# Altium PCB triboard-tc3x7-extension-V01.PcbDoc (part 2 of 2)
Units mm, origin at the board's own origin, x right, y up, seen from the top; angles counter-clockwise.
Board outline 170 x 190 mm, 4 copper layers (Top Layer, Mid Layer 1, Mid Layer 2, Bottom Layer), stack 1.586 mm thick; 25 components, 194 nets, 552 pads, 468 vias.
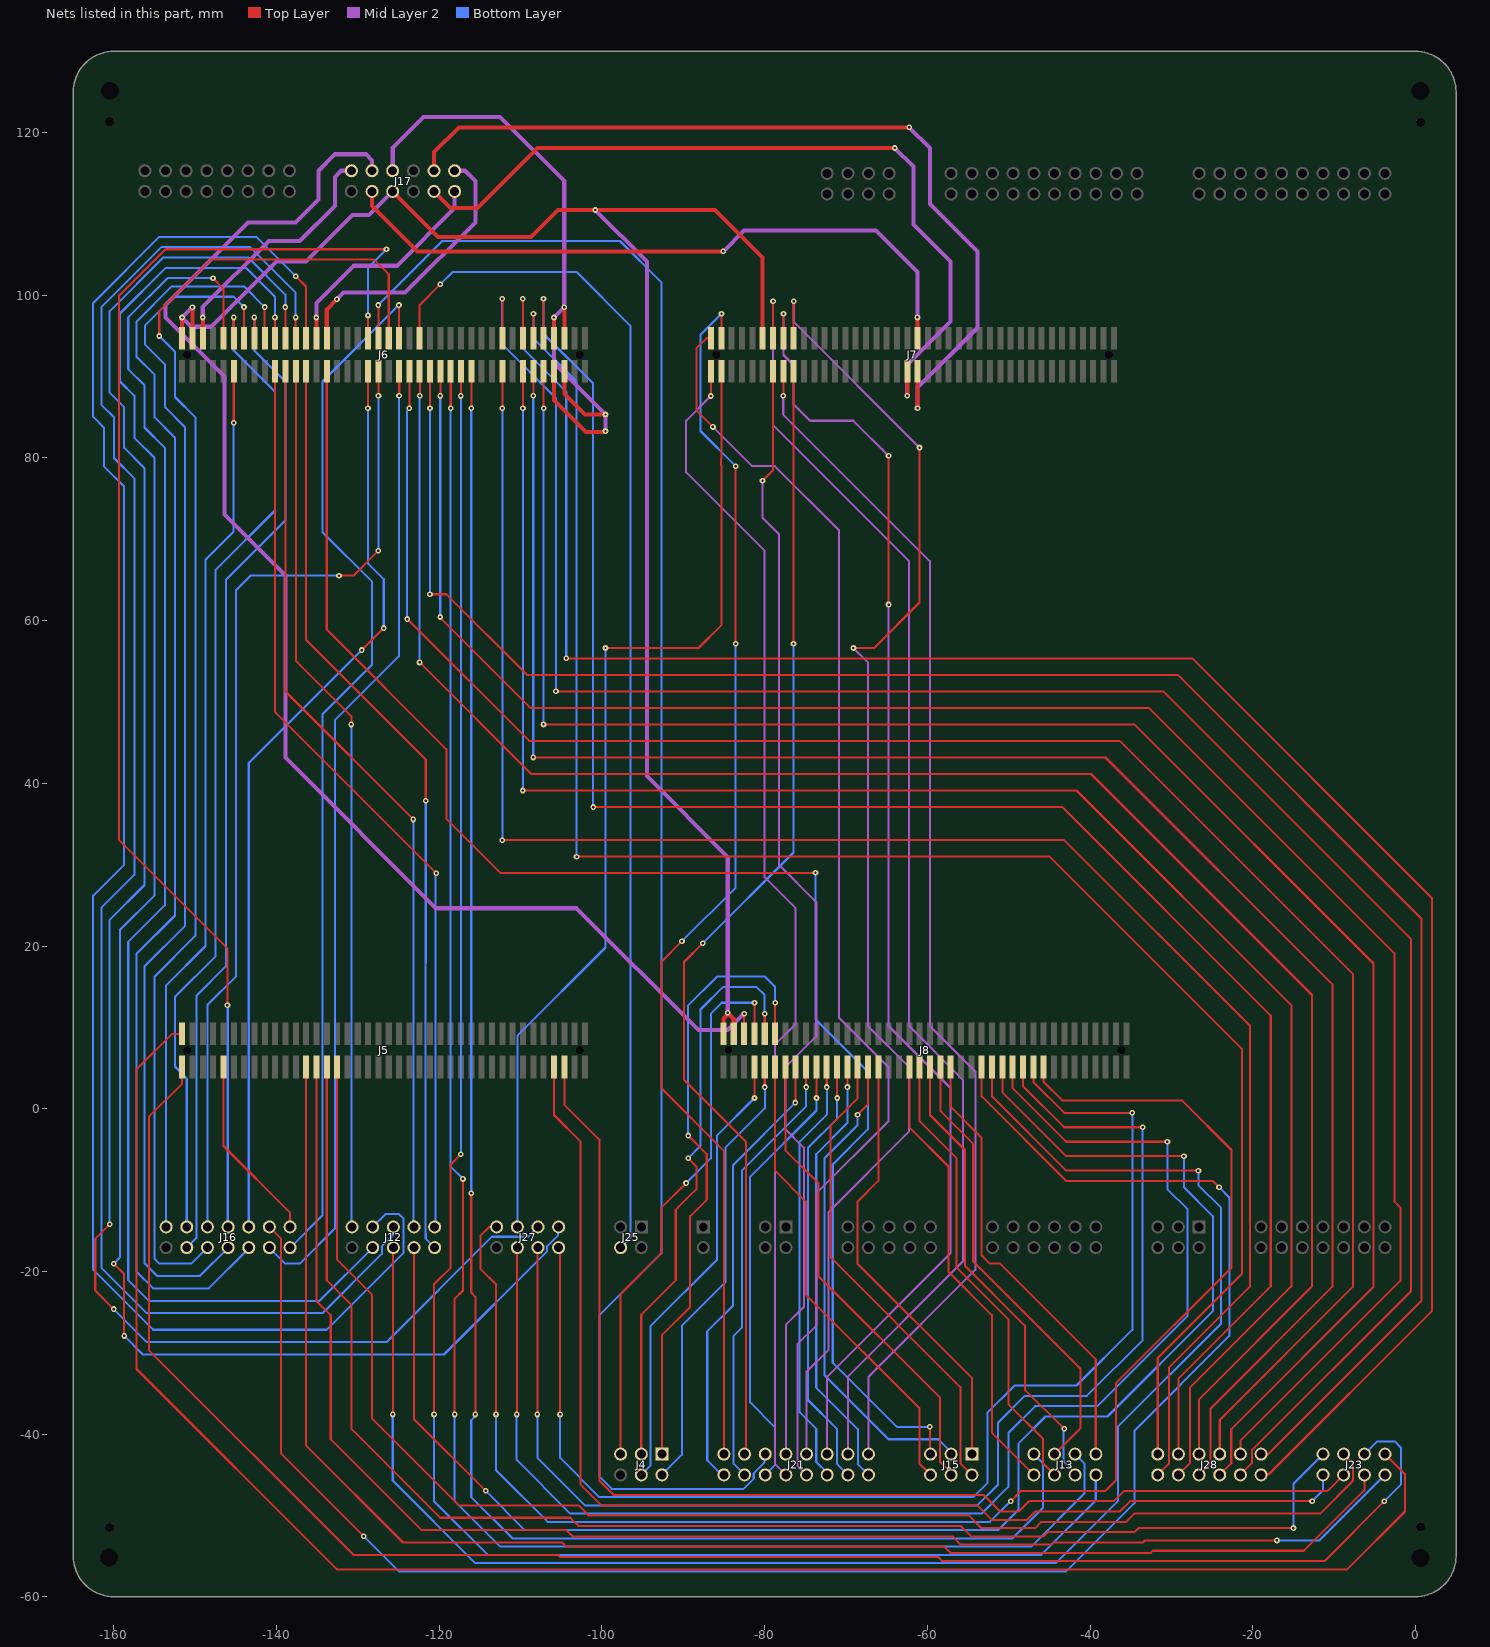
[diagram p4: the nets of this part, all layers, seen from the top]

## Via types
v1: diameter 0.7, hole 0.3, Top Layer to Bottom Layer, tented both sides, 468 vias

## Nets (pads, with @x,y where several pads share a name; then routed paths per layer and width w, separated by ;. In a path a pad name is that pad's centre, name@x,y a point inside that pad or via, vN(x,y) a via of type N, cw(c..) or ccw(c..) an arc to the next point about the centre after c; other vN are vias at no path point) (continued)
P13.3: J6.33 J25.4 | length 148.2
  Top Layer w0.254: J6.33@-122.408,94.723 -122.418,94.733 -122.418,98.816 v1(-119.888,101.346)
  Bottom Layer w0.254: v1(-119.888,101.346) -118.364,102.87 -103.124,102.87 -96.52,96.266 -96.52,-15.889 J25.4@-97.71,-17.079
P14.0: J6.61 J27.1 | length 219.8
  Top Layer w0.254: v1(-160.02,-19.05) -158.75,-20.32 v1(-158.75,-27.94) ; v1(-140.208,97.282) -140.198,97.272 J6.61@-140.198,94.733
  Bottom Layer w0.254: v1(-160.02,-19.05) -159.258,-18.288 -159.258,21.992 -155,26.25 -155,80 -157.5,82.5 -157.5,87.65 -159.258,89.408 -159.258,97.767 -153.647,103.378 -143.764,103.378 -140.208,99.822 v1(-140.208,97.282) ; v1(-158.75,-27.94) -156.464,-30.226 -119.423,-30.226 -106.743,-17.546 -106.743,-16.898 -105.4,-15.555 -105.4,-14.608 J27.1@-105.33,-14.539
P14.1: J6.59 J27.3 | length 219.2
  Top Layer w0.254: v1(-160.528,-14.224) -162.306,-16.002 -162.306,-22.352 v1(-160.02,-24.638) ; v1(-138.938,98.552) -138.928,98.542 J6.59@-138.928,94.733
  Bottom Layer w0.254: v1(-160.528,-14.224) -160.528,23.222 -156.25,27.5 -156.25,78.75 -158.75,81.25 -158.75,86.25 -160.528,88.028 -160.528,98.044 -153.924,104.648 -143.51,104.648 -138.938,100.076 v1(-138.938,98.552) ; v1(-160.02,-24.638) -155.956,-28.702 -126.492,-28.702 -113.538,-15.748 -109.079,-15.748 J27.3@-107.87,-14.539
P14.3: J7.78 J27.5 | length 122.3
  Top Layer w0.254: v1(-99.568,56.642) -88.138,56.642 -85.324,59.456 -85.324,79.061 -85.344,79.081 -85.344,79.923 -85.324,79.943 J7.78@-85.324,90.653
  Bottom Layer w0.254: J27.5@-110.41,-14.539 -110.41,8.97 -99.568,19.812 v1(-99.568,56.642)
P14.7: J8.18 J27.7 | length 187.9
  Top Layer w0.254: v1(-113.03,-37.592) -113.03,-21.59 -114.955,-19.665 -114.955,-15.641 -113.865,-14.551 -112.963,-14.551 J27.7@-112.95,-14.539 ; v1(-49.75,-48.25) -48.49,-46.99 -38.1,-46.99 -36.83,-45.72 -36.83,-33.782 -22.606,-19.558 -22.606,-5.08 -28.702,1.016 -43.434,1.016 -45.7,3.282 J8.18@-45.7,5.131
  Bottom Layer w0.254: v1(-113.03,-37.592) -113.03,-44.45 -106.68,-50.8 -52.324,-50.8 -49.774,-48.25 v1(-49.75,-48.25)
P14.8: J8.20 J27.2 | length 154.1
  Top Layer w0.254: J27.2@-105.33,-17.079 -105.156,-17.253 v1(-105.156,-37.592) ; J8.20@-46.97,5.131 -46.97,3.282 -43.18,-0.508 v1(-34.798,-0.508)
  Bottom Layer w0.254: v1(-105.156,-37.592) -105.156,-42.926 -100.33,-47.752 -54.356,-47.752 -52.578,-45.974 -52.578,-37.338 -49.276,-34.036 -41.656,-34.036 -34.798,-27.178 v1(-34.798,-0.508)
P14.9: J8.22 J27.4 | length 160.9
  Top Layer w0.254: v1(-107.95,-37.592) -107.91,-37.552 -107.91,-17.119 J27.4@-107.87,-17.079 ; J8.22@-48.24,5.131 -48.24,2.774 -43.18,-2.286 v1(-33.528,-2.286)
  Bottom Layer w0.254: v1(-107.95,-37.592) -107.95,-42.926 -102.108,-48.768 -53.848,-48.768 -51.308,-46.228 -51.308,-38.608 -48.006,-35.306 -40.386,-35.306 -33.528,-28.448 v1(-33.528,-2.286)
P14.10: J8.24 J27.6 | length 172.1
  Top Layer w0.254: v1(-110.49,-37.592) -110.45,-37.552 -110.45,-17.119 J27.6@-110.41,-17.079 ; J8.24@-49.51,5.131 -49.51,2.52 -42.926,-4.064 v1(-30.48,-4.064)
  Bottom Layer w0.254: v1(-110.49,-37.592) -110.49,-43.18 -103.886,-49.784 -53.34,-49.784 -50.038,-46.482 -50.038,-39.878 -46.736,-36.576 -39.116,-36.576 -28.003,-25.463 -28.003,-12.383 -30.48,-9.906 v1(-30.48,-4.064)
P15.0: J6.62 J12.1 | length 113.5
  Top Layer w0.254: J6.62@-140.188,90.653 -140.188,48.748 v1(-120.396,28.956)
  Bottom Layer w0.254: J12.1@-120.57,-14.539 -120.483,-14.452 -120.483,28.869 v1(-120.396,28.956)
P15.1: J6.60 J12.3 | length 111.7
  Top Layer w0.254: J6.60@-138.918,90.653 -138.918,51.288 v1(-123.19,35.56)
  Bottom Layer w0.254: v1(-123.19,35.56) -123.15,35.52 -123.15,-14.499 J12.3@-123.11,-14.539
P15.2: J6.57 J12.5 | length 200
  Top Layer w0.254: v1(-137.668,97.282) -137.658,97.272 -137.658,94.733 J6.57@-137.648,94.723
  Bottom Layer w0.254: v1(-137.668,97.282) -137.658,97.292 -137.658,100.32 -143.256,105.918 -154.178,105.918 -161.544,98.552 -161.544,86.544 -160,85 -160,80 -157.5,77.5 -157.5,28.75 -161.544,24.706 -161.544,-19.558 -155.956,-25.146 -134.366,-25.146 -127.063,-17.843 -127.063,-16.898 -125.72,-15.555 -125.72,-14.608 J12.5@-125.65,-14.539
P15.3: J6.55 J12.7 | length 214.4
  Top Layer w0.254: v1(-137.668,102.362) -136.388,101.082 J6.55@-136.388,94.733
  Bottom Layer w0.254: v1(-137.668,102.362) -142.494,107.188 -154.432,107.188 -162.56,99.06 -162.56,85.06 -161.25,83.75 -161.25,79 -158.75,76.5 -158.75,30 -162.56,26.19 -162.56,-19.812 -155.194,-27.178 -133.858,-27.178 -124.393,-17.713 -124.393,-13.529 -124.968,-12.954 -126.605,-12.954 J12.7@-128.177,-14.526
P15.4: J6.58 J12.9 | length 108.1
  Top Layer w0.254: J6.58@-137.638,90.663 -137.638,55.088 -130.81,48.26 v1(-130.81,47.244)
  Bottom Layer w0.254: v1(-130.81,47.244) -130.81,-14.459 J12.9@-130.73,-14.539
P15.5: J6.56 J12.2 | length 114.3
  Top Layer w0.254: J6.56@-136.368,90.663 -136.368,57.628 -121.666,42.926 v1(-121.666,37.846)
  Bottom Layer w0.254: v1(-121.666,37.846) -121.666,17.9 -121.697,17.869 -121.697,-14.539 -121.697,-14.563 -121.666,-15.983 -121.616,-16.033 J12.2@-120.57,-17.079
P15.6: J8.26 J12.4 | length 190.1
  Top Layer w0.254: J12.4@-123.11,-17.079 -123.11,-38.18 v1(-114.3,-46.99) ; J8.26@-50.78,5.131 -50.78,2.012 -42.926,-5.842 v1(-28.448,-5.842)
  Bottom Layer w0.254: v1(-114.3,-46.99) -109.474,-51.816 -51.308,-51.816 -48.768,-49.276 -48.768,-41.148 -45.466,-37.846 -37.846,-37.846 -24.892,-24.892 -24.892,-13.208 -28.448,-9.652 v1(-28.448,-5.842)
P15.7: J8.28 J12.6 | length 205
  Top Layer w0.254: v1(-125.73,-37.592) -125.69,-37.552 -125.69,-17.119 J12.6@-125.65,-17.079 ; J8.28@-52.05,5.131 -52.05,1.504 -42.926,-7.62 v1(-26.67,-7.62)
  Bottom Layer w0.254: v1(-125.73,-37.592) -125.73,-45.72 -115.57,-55.88 -44.196,-55.88 -36.576,-48.26 -36.576,-39.116 -23.876,-26.416 -23.876,-12.192 -26.67,-9.398 v1(-26.67,-7.62)
P15.8: J6.71 J12.8 | length 176.2
  Top Layer w0.254: v1(-147.828,102.108) -146.548,100.828 -146.548,94.733 J6.71@-146.538,94.723
  Bottom Layer w0.254: v1(-147.828,102.108) -153.416,102.108 -158.242,97.282 -158.242,90.932 -156.25,88.94 -156.25,83.75 -153.75,81.25 -153.75,25 -158.242,20.508 -158.242,-21.082 -155.702,-23.622 -134.733,-23.622 J12.8@-128.19,-17.079
P20.0: J5.72 J16.1 | length 23.1
  Top Layer w0.254: J5.72@-146.538,5.131 -146.538,-4.592 -138.35,-12.78 J16.1@-138.35,-14.539
P20.1: J8.30 J16.3 | length 224.5
  Top Layer w0.254: J16.3@-140.89,-14.539 -139.477,-15.952 -139.477,-42.387 v1(-129.286,-52.578) ; J8.30@-53.32,5.131 -53.32,1.504 -42.926,-8.89 -24.892,-8.89 v1(-24.13,-9.652)
  Bottom Layer w0.254: v1(-129.286,-52.578) -124.968,-56.896 -42.926,-56.896 -34.544,-48.514 -34.544,-39.624 -22.86,-27.94 -22.86,-10.922 v1(-24.13,-9.652)
P20.2: J6.44 J16.5 | length 113
  Top Layer w0.254: v1(-129.54,56.388) v1@-126.746,59.182 ; v1(-128.778,86.106) -128.768,86.116 -128.768,90.643 J6.44@-128.758,90.653
  Bottom Layer w0.254: J16.5@-143.43,-14.539 -143.43,42.498 v1(-129.54,56.388) ; v1(-128.778,86.106) -128.778,70.358 -128.778,67.056 -126.835,65.113 v1(-126.835,59.093)
P20.3: J6.43 J16.7 | length 167.2
  Top Layer w0.254: v1(-146.05,12.7) -146.05,19.711 -159.359,33.02 -159.359,99.975 -153.67,105.664 v1(-126.492,105.664) ; J6.43@-128.758,94.723 v1@-128.758,97.516
  Bottom Layer w0.254: v1(-146.05,12.7) -146.01,12.66 -146.01,-14.499 J16.7@-145.97,-14.539 ; v1(-128.768,97.526) -128.768,103.388 v1(-126.492,105.664)
P20.6: J6.42 J16.9 | length 121.3
  Top Layer w0.254: v1(-132.334,65.532) -130.556,65.532 v1(-127.508,68.58) ; v1(-127.488,87.65) -127.478,87.66 J6.42@-127.478,90.663
  Bottom Layer w0.254: J16.9@-148.51,-14.539 -148.51,12.74 -144.984,16.266 -144.984,63.766 -143.218,65.532 v1(-132.334,65.532) ; v1(-127.508,68.58) -127.498,68.59 -127.498,87.64 v1(-127.488,87.65)
P20.7: J6.69 J16.11 | length 122.2
  Top Layer w0.254: v1(-145.288,97.282) -145.278,97.272 -145.278,94.733 J6.69@-145.268,94.723
  Bottom Layer w0.254: J16.11@-151.05,-14.539 -151.05,3.73 -152.5,5.18 -152.5,13.75 -147.5,18.75 -147.5,66.25 -140.208,73.542 -140.208,88.138 -145.288,93.218 v1(-145.288,97.282)
P20.8: J6.70 J16.13 | length 108.7
  Top Layer w0.254: v1(-145.288,84.328) -145.278,84.338 -145.278,90.643 J6.70@-145.258,90.663
  Bottom Layer w0.254: J16.13@-153.59,-14.539 -153.59,15.16 -148.75,20 -148.75,67.5 -145.288,70.962 v1(-145.288,84.328)
P20.9: J6.37 J16.2 | length 130.5
  Top Layer w0.254: J6.37@-124.958,94.733 v1@-124.958,98.796
  Bottom Layer w0.254: J16.2@-138.35,-17.079 -134.366,-13.095 -134.366,48.514 -128.27,54.61 -128.27,64.77 -134.366,70.866 -134.366,89.408 v1(-124.968,98.806)
P20.10: J6.38 J16.4 | length 119.3
  Top Layer w0.254: v1(-124.948,87.65) -124.928,87.67 J6.38@-124.928,90.673
  Bottom Layer w0.254: J16.4@-140.89,-17.079 -138.919,-19.05 -137.16,-19.05 -132.842,-14.732 -132.842,47.752 -124.968,55.626 -124.968,71.404 -124.948,71.424 v1(-124.948,87.65)
P20.11: J6.63 J16.6 | length 160
  Top Layer w0.254: v1(-141.478,98.552) -141.468,98.542 -141.468,94.733 J6.63@-141.458,94.723
  Bottom Layer w0.254: J16.6@-143.43,-17.079 -143.43,-17.192 -148.336,-22.098 -155.194,-22.098 -157.226,-20.066 -157.226,19.024 -152.5,23.75 -152.5,82.5 -155,85 -155,90.23 -157.226,92.456 -157.226,96.774 -152.908,101.092 -144.018,101.092 v1(-141.478,98.552)
P20.12: J6.67 J16.8 | length 149.8
  Top Layer w0.254: v1(-144.018,98.552) -144.008,98.542 -144.008,94.733 J6.67@-143.998,94.723
  Bottom Layer w0.254: J16.8@-145.97,-17.079 -149.465,-20.574 -154.686,-20.574 -156.25,-19.01 -156.25,17.5 -151.25,22.5 -151.25,83.75 -153.714,86.214 -153.714,91.484 -156.21,93.98 -156.21,96.266 -152.654,99.822 -145.288,99.822 v1(-144.018,98.552)
P20.13: J6.39 J16.10 | length 167.4
  Top Layer w0.254: v1(-154.432,94.996) -154.432,98.044 -148.082,104.394 -128.016,104.394 -126.218,102.596 J6.39@-126.218,94.723
  Bottom Layer w0.254: v1(-154.432,94.996) -152.5,93.064 -152.5,87.5 -150,85 -150,21.25 -155,16.25 -155,-18.482 -154.432,-19.05 -150.481,-19.05 J16.10@-148.51,-17.079
P20.14: J6.65 J16.12 | length 123.5
  Top Layer w0.254: v1(-142.748,97.282) -142.738,97.272 -142.738,94.733 J6.65@-142.728,94.723
  Bottom Layer w0.254: J16.12@-151.05,-17.079 -149.86,-15.889 -149.86,13.89 -146.25,17.5 -146.25,65 -138.938,72.312 -138.938,89.408 -142.748,93.218 v1(-142.748,97.282)
P21.0: J5.79 J23.1 | length 221.4
  Top Layer w0.254: J5.79@-151.618,9.201 -152.851,9.201 -157.226,4.826 -157.226,-32.004 -132.588,-56.642 -8.382,-56.642 -1.27,-49.53 -1.27,-44.939 J23.1@-3.73,-42.479
P21.1: J5.80 J23.3 | length 215.1
  Top Layer w0.254: J5.80@-151.618,5.131 -151.618,3.068 -155.702,-1.016 -155.702,-29.718 -130.556,-54.864 -105.41,-54.864 -105.156,-55.118 -58.674,-55.118 -58.166,-55.626 -11.176,-55.626 v1(-3.81,-48.26)
  Bottom Layer w0.254: J23.3@-6.257,-42.466 -4.685,-40.894 -2.54,-40.894 -1.778,-41.656 -1.778,-46.228 v1(-3.81,-48.26)
P21.2: J5.50 J23.5 | length 177.3
  Top Layer w0.254: J5.50@-132.568,5.131 -132.568,-18.562 -128.27,-22.86 -128.27,-38.1 -117.602,-48.768 -102.87,-48.768 -101.6,-50.038 -54.864,-50.038 -53.34,-51.562 -46.736,-51.562 -45.974,-50.8 -35.56,-50.8 -34.544,-49.784 -11.684,-49.784 -7.683,-45.783 -7.683,-43.606 J23.5@-8.81,-42.479
P21.3: J5.52 J23.7 | length 178.1
  Top Layer w0.254: J5.52@-133.838,5.131 -133.838,-21.102 -130.81,-24.13 -130.81,-39.37 -119.888,-50.292 -103.886,-50.292 -102.87,-51.308 -55.88,-51.308 -54.61,-52.578 -45.72,-52.578 -45.212,-52.07 -34.544,-52.07 -34.036,-51.562 v1(-14.986,-51.562)
  Bottom Layer w0.254: v1(-14.986,-51.562) -14.986,-46.115 J23.7@-11.35,-42.479
P21.4: J5.54 J23.2 | length 185.1
  Top Layer w0.254: J5.54@-135.108,5.131 -135.108,-23.642 -133.35,-25.4 -133.35,-40.64 -122.174,-51.816 -104.394,-51.816 -103.632,-52.578 -56.896,-52.578 -55.88,-53.594 -44.704,-53.594 -44.45,-53.34 -33.528,-53.34 -33.274,-53.086 v1@-17.029,-53.086 ; J23.2@-3.77,-45.059 J23.2@-3.73,-45.019
  Bottom Layer w0.254: v1(-17.018,-53.086) -11.797,-53.086 J23.2@-3.73,-45.019
P21.5: J5.56 J23.4 | length 187.2
  Top Layer w0.254: J5.56@-136.378,5.131 -136.378,-41.422 -124.46,-53.34 -104.902,-53.34 -104.394,-53.848 -57.912,-53.848 -57.15,-54.61 -32.512,-54.61 -32.258,-54.356 -13.716,-54.356 -6.27,-46.91 J23.4@-6.27,-45.019
P21.6: J5.06 J23.6 | length 147.6
  Top Layer w0.254: J5.06@-104.628,5.131 -104.628,0.488 -100.33,-3.81 -100.33,-45.72 -98.552,-47.498 -53.086,-47.498 -51.054,-49.53 -48.768,-49.53 -47.498,-48.26 -37.084,-48.26 -35.814,-46.99 -10.781,-46.99 J23.6@-8.81,-45.019
P21.7: J5.08 J23.8 | length 149.2
  Top Layer w0.254: J5.08@-105.898,5.131 -105.898,-0.782 -102.616,-4.064 -102.616,-46.228 -100.076,-48.768 -53.848,-48.768 -52.07,-50.546 -47.752,-50.546 -46.736,-49.53 -36.322,-49.53 -35.052,-48.26 v1(-12.7,-48.26) ; J23.8@-11.39,-45.059 J23.8@-11.35,-45.019
  Bottom Layer w0.254: v1(-12.7,-48.26) -11.35,-46.91 J23.8@-11.35,-45.019
P22.0: J6.32 J28.1 | length 240.4
  Top Layer w0.254: v1(-121.158,63.246) -119.126,63.246 -109.22,53.34 -29.21,53.34 0.762,23.368 0.762,-23.622 -18.055,-42.439 -18.93,-42.439 J28.1@-18.97,-42.479 ; v1@-121.138,86.126 J6.32@-121.138,90.653
  Bottom Layer w0.254: v1(-121.158,63.246) -121.153,63.251 -121.153,86.111 v1(-121.148,86.116)
P22.1: J6.30 J28.3 | length 234.7
  Top Layer w0.254: v1(-119.888,60.452) -119.888,60.365 -108.799,49.276 -32.766,49.276 -2.54,19.05 -2.54,-11.46 -1.849,-12.151 -1.849,-21.153 -21.51,-40.814 J28.3@-21.51,-42.479 ; v1@-119.868,87.65 J6.30@-119.868,90.653
  Bottom Layer w0.254: v1(-119.888,60.452) v1(-119.888,87.63)
P22.2: J6.36 J28.5 | length 230.7
  Top Layer w0.254: v1(-123.952,60.198) -108.966,45.212 -36.322,45.212 -7.683,16.573 -7.683,-21.907 -24.05,-38.274 J28.5@-24.05,-42.479 ; v1@-123.678,86.126 J6.36@-123.678,90.653
  Bottom Layer w0.254: v1(-123.952,60.198) -123.952,85.793 -123.688,86.057 v1(-123.688,86.116)
P22.3: J6.34 J28.7 | length 224.7
  Top Layer w0.254: v1(-122.428,54.864) -108.712,41.148 -39.878,41.148 -12.7,13.97 -12.7,-21.844 -26.59,-35.734 J28.7@-26.59,-42.479 ; v1@-122.388,87.67 J6.34@-122.388,90.673
  Bottom Layer w0.254: v1(-122.428,54.864) -122.418,54.874 -122.418,87.64 v1(-122.408,87.65)
P22.4: J6.09 J28.9 | length 222.4
  Top Layer w0.254: v1(-107.188,99.568) -107.178,99.558 -107.178,94.733 J6.09@-107.168,94.723 ; v1(-101.092,37.084) -43.434,37.084 -17.78,11.43 -17.78,-21.844 -29.13,-33.194 J28.9@-29.13,-42.479
  Bottom Layer w0.254: v1(-107.188,99.568) -107.188,95.25 -101.092,89.154 v1(-101.092,37.084)
P22.5: J6.11 J28.11 | length 217.7
  Top Layer w0.254: J6.11@-108.438,94.723 v1@-108.438,97.726 ; v1(-103.124,30.988) -44.958,30.988 -21.336,7.366 -21.336,-20.32 -31.67,-30.654 J28.11@-31.67,-42.479
  Bottom Layer w0.254: v1(-108.428,97.736) -108.428,94.712 -103.124,89.408 -103.124,31.75 -103.136,31.738 -103.136,31 v1(-103.124,30.988)
P22.6: J6.13 J28.2 | length 250
  Top Layer w0.254: v1(-109.728,99.568) -109.718,99.558 -109.718,94.733 J6.13@-109.708,94.723 ; v1(-104.394,55.372) -27.432,55.372 2.032,25.908 2.032,-24.892 -18.055,-44.979 -18.93,-44.979 J28.2@-18.97,-45.019
  Bottom Layer w0.254: v1(-109.728,99.568) -109.728,93.472 -104.394,88.138 v1(-104.394,55.372)
P22.7: J6.17 J28.4 | length 248.2
  Top Layer w0.254: v1(-112.268,99.568) -112.258,99.558 -112.258,94.733 J6.17@-112.248,94.723 ; v1(-105.664,51.308) -30.988,51.308 -0.508,20.828 -0.508,-22.423 -20.097,-42.012 -20.097,-43.606 J28.4@-21.51,-45.019
  Bottom Layer w0.254: v1(-112.268,99.568) -112.268,93.98 -105.664,87.376 v1(-105.664,51.308)
P22.8: J6.10 J28.6 | length 228.3
  Top Layer w0.254: v1(-107.188,47.244) -34.544,47.244 -5.143,17.843 -5.143,-21.907 -22.637,-39.401 -22.637,-43.606 J28.6@-24.05,-45.019 ; v1@-107.168,86.126 J6.10@-107.168,90.653
  Bottom Layer w0.254: v1(-107.188,47.244) -107.183,47.249 -107.183,86.111 v1(-107.178,86.116)
P22.9: J6.12 J28.8 | length 224.4
  Top Layer w0.254: v1(-108.458,43.18) -38.1,43.18 -10.16,15.24 -10.16,-21.844 -25.177,-36.861 -25.177,-43.606 J28.8@-26.59,-45.019 ; v1@-108.438,87.65 J6.12@-108.438,90.653
  Bottom Layer w0.254: v1(-108.458,43.18) -108.453,43.185 -108.453,87.635 v1(-108.448,87.64)
P22.10: J6.14 J28.10 | length 220.4
  Top Layer w0.254: v1(-109.728,39.116) -41.656,39.116 -15.24,12.7 -15.24,-21.844 -27.717,-34.321 -27.717,-43.606 J28.10@-29.13,-45.019 ; v1@-109.708,86.126 J6.14@-109.708,90.653
  Bottom Layer w0.254: v1(-109.728,39.116) -109.723,39.121 -109.723,86.111 v1(-109.718,86.116)
P22.11: J6.18 J28.12 | length 218.9
  Top Layer w0.254: v1(-112.25,33) -112.23,33.02 -43.18,33.02 -20.32,10.16 -20.32,-21.844 -30.311,-31.835 -30.311,-43.66 J28.12@-31.67,-45.019 ; v1@-112.248,86.126 J6.18@-112.248,90.653
  Bottom Layer w0.254: v1(-112.258,86.116) -112.254,86.112 -112.254,33.004 v1(-112.25,33)
P23.0: J8.36 J13.1 | length 55.7
  Top Layer w0.254: J8.36@-57.13,5.131 -57.13,0.234 -53.34,-3.556 -53.34,-18.034 -52.324,-19.05 -51.054,-19.05 -39.29,-30.814 J13.1@-39.29,-42.479
P23.1: J6.28 J13.3 | length 227.7
  Top Layer w0.254: v1@-118.598,86.126 J6.28@-118.598,90.653 ; v1(-118.11,-37.592) -118.11,-23.368 -117.094,-22.352 v1(-117.094,-8.636)
  Bottom Layer w0.254: v1(-118.608,86.116) -118.608,-7.122 v1(-117.094,-8.636) ; v1(-118.11,-37.592) -118.11,-48.26 -112.522,-53.848 -47.244,-53.848 -40.703,-47.307 -40.703,-43.606 J13.3@-41.83,-42.479
P23.2: J8.38 J13.5 | length 56.1
  Top Layer w0.254: J8.38@-58.4,5.131 -58.4,-0.274 -54.356,-4.318 -54.356,-18.796 -41.148,-32.004 -41.148,-39.257 J13.5@-44.37,-42.479
P23.3: J6.24 J13.7 | length 219.8
  Top Layer w0.254: v1(-116.078,-10.414) -116.078,-22.606 -115.57,-23.114 v1(-115.57,-37.592) ; v1@-116.058,86.126 J6.24@-116.058,90.653
  Bottom Layer w0.254: v1(-116.078,-10.414) -116.078,86.106 v1(-116.068,86.116) ; v1(-115.57,-37.592) -115.57,-37.779 -116.078,-38.287 -116.078,-47.752 -110.998,-52.832 -49.53,-52.832 -45.783,-49.085 -45.783,-43.606 J13.7@-46.91,-42.479
P23.4: J6.26 J13.2 | length 230.3
  Top Layer w0.254: v1(-120.65,-37.592) -120.65,-21.59 -118.618,-19.558 -118.618,-6.858 v1(-117.348,-5.588) ; v1@-117.328,87.65 J6.26@-117.328,90.653
  Bottom Layer w0.254: v1(-120.65,-37.592) -120.65,-48.26 -114.046,-54.864 -45.974,-54.864 -39.29,-48.18 J13.2@-39.29,-45.019 ; v1(-117.348,-5.588) v1(-117.348,87.63)
P23.5: J8.40 J13.4 | length 57.6
  Top Layer w0.254: J8.40@-59.67,5.131 -59.67,-0.782 -55.372,-5.08 -55.372,-19.304 -48.006,-26.67 -48.006,-34.544 v1(-43.18,-39.37)
  Bottom Layer w0.254: v1(-43.18,-39.37) -43.243,-39.433 -43.243,-43.371 -41.83,-44.784 J13.4@-41.83,-45.019
P23.6: J8.42 J13.6 | length 57
  Top Layer w0.254: J8.42@-60.94,5.131 -60.94,-1.544 -56.388,-6.096 -56.388,-19.558 -50.038,-25.908 -50.038,-36.322 -45.783,-40.577 -45.783,-43.606 J13.6@-44.37,-45.019
P23.7: J8.44 J13.8 | length 56.5
  Top Layer w0.254: J8.44@-62.21,5.131 -62.21,-2.306 -57.404,-7.112 -57.404,-20.066 -52.07,-25.4 -52.07,-39.859 J13.8@-46.91,-45.019
P32.2: J8.50 J15.1 | length 54.5
  Top Layer w0.254: J8.50@-66.02,5.131 -66.02,-8.87 -68.58,-11.43 -68.58,-19.05 -54.53,-33.1 J15.1@-54.53,-42.479
P32.3: J8.52 J15.3 | length 59.8
  Top Layer w0.254: v1(-68.58,-0.762) -67.29,0.528 J8.52@-67.29,5.131
  Bottom Layer w0.254: v1(-68.58,-0.762) -68.58,-2.032 -72.644,-6.096 -72.644,-32.766 -64.77,-40.64 -58.674,-40.64 -57.07,-42.244 J15.3@-57.07,-42.479
P32.4: J6.52 J15.5 | length 192.6
  Top Layer w0.254: J6.52@-133.838,90.653 -133.838,58.908 -119.126,44.196 -119.126,35.626 -112.456,28.956 -73.794,28.956 v1(-73.75,29) ; v1(-59.69,-39.116) -59.65,-39.156 -59.65,-42.439 J15.5@-59.61,-42.479
  Bottom Layer w0.254: v1(-73.75,29) -73.75,11.012 -67.31,4.572 -67.31,-2.54 -71.628,-6.858 -71.628,-31.242 -63.754,-39.116 v1(-59.69,-39.116)
P32.5: J8.54 J15.2 | length 58.7
  Top Layer w0.254: J8.54@-68.56,5.131 -68.56,1.303 -71.882,-2.019 -71.882,-18.288 -55.943,-34.227 -55.943,-43.606 J15.2@-54.53,-45.019
P32.6: J8.68 J15.4 | length 58.6
  Top Layer w0.254: J8.68@-77.45,5.131 -77.45,-5.1 -73.406,-9.144 -73.406,-20.574 -58.42,-35.56 -58.42,-43.434 -57.07,-44.784 J15.4@-57.07,-45.019
P32.7: J8.70 J15.6 | length 58.1
  Top Layer w0.254: J8.70@-78.72,5.131 -78.72,-7.64 -74.93,-11.43 -74.93,-22.86 -60.96,-36.83 -60.96,-43.669 J15.6@-59.61,-45.019
P33.0: J7.66 J21.1 | length 148.4
  Top Layer w0.254: v1(-77.714,87.64) -77.704,87.65 J7.66@-77.704,90.653
  Mid Layer 2 w0.254: v1(-77.714,87.64) -77.714,85.334 -59.69,67.31 -59.69,10.16 -54.102,4.572 -54.102,-19.812 -67.23,-32.94 J21.1@-67.23,-42.479
P33.1: J7.67 J21.3 | length 161.8
  Top Layer w0.254: J7.67@-78.974,94.723 v1@-78.974,99.25
  Mid Layer 2 w0.254: v1(-78.964,99.26) -78.964,84.044 -62.23,67.31 -62.23,10.16 -55.626,3.556 -55.626,-18.796 -69.77,-32.94 J21.3@-69.77,-42.479
P33.2: J7.65 J21.5 | length 161.1
  Top Layer w0.254: J7.65@-77.704,94.723 v1@-77.704,97.726 ; v1(-64.77,61.976) v1(-64.77,80.264)
  Mid Layer 2 w0.254: v1(-77.684,97.747) -77.684,92.658 -76.454,91.428 -76.454,86.614 -74.422,84.582 -69.088,84.582 v1(-64.77,80.264) ; J21.5@-72.31,-42.479 -72.31,-32.94 -57.15,-17.78 -57.15,2.54 -64.77,10.16 v1(-64.77,61.976)
P33.3: J7.63 J21.7 | length 165.6
  Top Layer w0.254: J7.63@-76.434,94.723 v1@-76.434,99.25 ; v1(-69.088,56.642) -66.548,56.642 -60.96,62.23 v1(-60.96,81.28)
  Mid Layer 2 w0.254: v1(-76.424,99.26) -76.424,96.744 v1(-60.96,81.28) ; J21.7@-74.85,-42.479 -74.85,-32.35 -72.136,-29.636 -72.136,-12.7 -62.23,-2.794 -62.23,5.08 -67.31,10.16 -67.31,54.864 v1(-69.088,56.642)
P33.4: J7.68 J21.9 | length 139.8
  Top Layer w0.254: v1(-80.264,77.216) -78.974,78.506 J7.68@-78.974,90.653
  Mid Layer 2 w0.254: v1(-80.264,77.216) -80.264,72.644 -78.232,70.612 -78.232,29.972 -73.66,25.4 -73.66,8.89 -77.47,5.08 -77.47,-2.504 -75.184,-4.79 -75.184,-24.384 -77.39,-26.59 J21.9@-77.39,-42.479
P33.5: J6.41 J21.11 | length 217.9
  Top Layer w0.254: J6.41@-127.498,94.733 v1@-127.498,98.796
  Bottom Layer w0.254: v1(-127.508,98.806) -119.634,106.68 -97.79,106.68 -92.71,101.6 -92.71,-17.78 -100.33,-25.4 -100.33,-45.212 -98.806,-46.736 -82.593,-46.736 -81.343,-45.486 -81.343,-44.838 -80,-43.495 -80,-42.548 J21.11@-79.93,-42.479
P33.6: J7.64 J21.13 | length 141.9
  Top Layer w0.254: v1(-87.63,20.32) -89.916,18.034 -89.916,3.556 -82.296,-4.064 -82.296,-42.305 J21.13@-82.47,-42.479 ; v1(-76.454,57.15) -76.444,57.16 -76.444,90.643 J7.64@-76.434,90.653
  Bottom Layer w0.254: v1(-87.63,20.32) -76.454,31.496 v1(-76.454,57.15)
P33.7: J7.77 J21.15 | length 153.1
  Top Layer w0.254: v1(-90.17,20.574) -92.71,18.034 -92.71,2.54 -85.01,-5.16 J21.15@-85.01,-42.479 ; J7.77@-85.329,94.718 v1@-85.329,97.722 ; v1(-83.566,57.15) v1(-83.566,78.994)
  Bottom Layer w0.254: v1(-90.17,20.574) -83.566,27.178 v1(-83.566,57.15) ; v1(-85.309,97.742) -87.884,95.166 -87.884,83.312 v1(-83.566,78.994)
P33.8: J8.56 J21.2 | length 54.4
  Top Layer w0.254: v1@-69.83,2.669 J8.56@-69.83,5.131
  Bottom Layer w0.254: v1(-69.82,2.659) -69.82,-1.748 -73.66,-5.588 -73.66,-34.29 -68.548,-39.402 -68.548,-43.701 J21.2@-67.23,-45.019
P33.9: J8.58 J21.4 | length 53.7
  Top Layer w0.254: v1@-71.1,1.323 J8.58@-71.1,5.131
  Bottom Layer w0.254: v1(-71.09,1.313) -71.09,-1.24 -74.676,-4.826 -74.676,-35.814 -71.12,-39.37 -71.12,-43.669 J21.4@-69.77,-45.019
P33.10: J8.60 J21.6 | length 52.9
  Top Layer w0.254: v1@-72.37,2.669 J8.60@-72.37,5.131
  Bottom Layer w0.254: v1(-72.36,2.659) -72.36,-0.732 -75.692,-4.064 -75.692,-37.338 -73.66,-39.37 -73.66,-43.434 -72.31,-44.784 J21.6@-72.31,-45.019
P33.11: J7.79 J21.8 | length 157.3
  Top Layer w0.254: J7.79@-86.594,94.723 -87.141,94.723 -88.392,93.472 -88.392,85.852 v1(-86.36,83.82)
  Mid Layer 2 w0.254: v1(-86.36,83.82) -81.534,78.994 -78.74,78.994 -70.866,71.12 -70.866,11.176 -64.77,5.08 -64.77,-1.524 -73.66,-10.414 -73.66,-26.67 -75.977,-28.987 -75.977,-43.892 J21.8@-74.85,-45.019
P33.12: J7.80 J21.10 | length 144.1
  Top Layer w0.254: v1@-86.599,87.645 J7.80@-86.599,90.648
  Mid Layer 2 w0.254: v1(-86.619,87.625) -89.662,84.582 -89.662,78.232 -80.01,68.58 -80.01,28.448 -76.2,24.638 -76.2,10.414 -78.74,7.874 -78.74,-43.669 J21.10@-77.39,-45.019
P33.13: J8.62 J21.12 | length 55.3
  Top Layer w0.254: v1@-73.64,1.323 J8.62@-73.64,5.131
  Bottom Layer w0.254: J21.12@-79.93,-45.019 -78.74,-43.829 -78.74,-39.165 -81.788,-36.117 -81.788,-8.382 -73.63,-0.224 v1(-73.63,1.313)
P33.14: J8.64 J21.14 | length 54.4
  Top Layer w0.254: v1@-74.91,2.669 J8.64@-74.91,5.131
  Bottom Layer w0.254: J21.14@-82.47,-45.019 -83.82,-43.669 -83.82,-27.94 -82.804,-26.924 -82.804,-7.62 -74.9,0.284 v1(-74.9,2.659)
P33.15: J8.66 J21.16 | length 55.7
  Top Layer w0.254: v1(-76.25,0.75) -76.215,0.785 -76.215,5.096 J8.66@-76.18,5.131
  Bottom Layer w0.254: J21.16@-85.01,-45.019 -85.283,-45.019 -87.061,-43.241 -87.061,-27.371 -83.883,-24.193 -83.883,-6.921 -76.25,0.712 v1(-76.25,0.75)
P34.1: J4.1 J8.69 | length 76.9
  Top Layer w0.254: J4.1@-92.63,-42.479 -92.63,-27.86 -89.154,-24.384 -89.154,-13.208 -87.122,-11.176 -87.122,-5.588 v1(-89.408,-3.302) ; J8.69@-78.72,9.201 v1@-78.72,13.01
  Bottom Layer w0.254: v1(-89.408,-3.302) -89.408,12.7 -85.852,16.256 -80.01,16.256 -78.71,14.956 v1(-78.71,13.02)
P34.2: J4.3 J8.71 | length 72.8
  Top Layer w0.254: J4.3@-95.17,-42.479 -95.17,-25.32 -90.932,-21.082 -90.932,-12.446 -88.392,-9.906 -88.392,-7.112 v1(-89.408,-6.096) ; J8.71@-79.99,9.201 v1@-79.99,11.664
  Bottom Layer w0.254: v1(-89.408,-6.096) -87.884,-4.572 -87.884,12.192 -85.09,14.986 -81.026,14.986 -80.01,13.97 -80.01,11.704 v1(-79.98,11.674)
P34.3: J4.5 J8.73 | length 68.5
  Top Layer w0.254: J4.5@-97.71,-42.479 -97.71,-22.78 -92.71,-17.78 -92.71,-12.192 v1(-89.662,-9.144) ; J8.73@-81.26,9.201 v1@-81.26,13.01
  Bottom Layer w0.254: v1(-89.662,-9.144) -86.614,-6.096 -86.614,11.684 -85.278,13.02 v1(-81.25,13.02)
P34.4: J4.2 J8.72 | length 55.4
  Top Layer w0.254: v1@-79.99,2.669 J8.72@-79.99,5.131
  Bottom Layer w0.254: J4.2@-92.63,-45.019 -90.17,-42.559 -90.17,-26.67 -84.836,-21.336 -84.836,-4.826 -79.98,0.03 v1(-79.98,2.659)
P34.5: J4.4 J8.74 | length 55.9
  Top Layer w0.254: v1@-81.26,1.323 J8.74@-81.26,5.131
  Bottom Layer w0.254: J4.4@-95.17,-45.019 -94.043,-43.892 -94.043,-42.479 -94.043,-26.733 -85.852,-18.542 -85.852,-3.289 v1(-81.25,1.313)
VAREF1: J7.40 J17.3 | length 107.5
  Top Layer w0.5: J17.3@-120.65,115.316 -120.65,117.602 -117.602,120.65 v1(-62.23,120.65) ; v1@-61.194,86.126 J7.40@-61.194,90.653
  Mid Layer 2 w0.5: v1(-62.23,120.65) -59.69,118.11 -59.69,111.252 -53.848,105.41 -53.848,96.012 -61.204,88.656 v1(-61.204,86.116)
VAREF2: J7.42 J17.4 | length 99.1
  Top Layer w0.254: v1(-62.474,87.64) v1@-62.464,87.65
  Top Layer w0.5: J17.4@-120.65,112.776 -118.618,110.744 -115.316,110.744 -107.95,118.11 v1(-64.008,118.11) ; v1@-62.464,87.65 J7.42@-62.464,90.653
  Mid Layer 2 w0.5: v1(-64.008,118.11) -61.722,115.824 -61.722,108.712 -57.15,104.14 -57.15,96.774 -62.474,91.45 v1(-62.474,87.64)
VCC_IN: J6.05 J6.06 J6.07 J6.08 J17.7 | length 89.6
  Top Layer w0.5: J6.08@-105.898,90.903 -105.898,87.102 -101.995,83.199 -99.681,83.199 v1(-99.568,83.312) ; J6.07@-105.898,94.723 v1@-105.898,97.262 ; J6.06@-104.628,90.653 -104.628,87.864 -102.108,85.344 v1(-99.568,85.344) ; J6.05@-104.628,94.723 v1@-104.628,98.532
  Mid Layer 2 w0.5: J17.7@-125.73,115.316 -125.73,118.11 -121.92,121.92 -112.522,121.92 -104.638,114.036 v1(-104.638,98.542) v1(-105.908,97.272) -105.908,91.684 v1(-99.568,85.344) v1(-99.568,83.312)
VDDM: J7.39 J17.10 | length 82.5
  Top Layer w0.254: v1(-61.214,97.282) v1@-61.204,97.272 ; J7.39@-61.204,94.733 J7.39@-61.194,94.723
  Top Layer w0.5: J17.10@-128.27,112.776 -128.27,110.998 -122.682,105.41 v1(-85.09,105.41) ; J7.39@-61.204,94.733 v1@-61.204,97.272
  Mid Layer 2 w0.5: v1(-85.09,105.41) -82.55,107.95 -66.294,107.95 -61.214,102.87 v1(-61.214,97.282)
VDDSB: J6.75 J17.11 | length 31.1
  Top Layer w0.5: J6.75@-149.078,94.723 v1@-149.078,97.262
  Mid Layer 2 w0.5: v1(-149.088,97.272) -149.088,98.562 -140.97,106.68 -137.16,106.68 -132.842,110.998 -132.842,114.554 -132.08,115.316 J17.11@-130.81,115.316
VEXT: J6.77 J6.79 J7.69 J8.77 J8.79 J17.8 | length 213.9
  Top Layer w0.5: J6.79@-151.618,94.723 v1@-151.618,97.262 ; J6.77@-150.348,94.723 v1@-150.348,98.532 ; J17.8@-125.73,112.776 -120.142,107.188 -108.712,107.188 -105.41,110.49 v1(-100.838,110.49) -86.106,110.49 -80.244,104.628 J7.69@-80.244,94.723 ; J8.79@-85.07,9.201 -85.07,11.057 v1@-84.542,11.585 ; v1(-84.542,11.793) -83.8,11.051 J8.77@-83.8,9.201
  Mid Layer 2 w0.5: v1(-150.358,98.542) v1(-151.628,97.272) -150.489,96.133 -148.048,96.133 -140.041,104.14 -136.398,104.14 -130.661,109.877 -128.629,109.877 J17.8@-125.73,112.776 ; v1(-100.838,110.49) -94.488,104.14 -94.488,40.894 -84.542,30.948 v1(-84.542,11.793)
VFLEX: J8.75 J17.9 | length 172.1
  Top Layer w0.254: J8.75@-82.53,9.201 v1@-82.53,11.664
  Mid Layer 2 w0.5: J17.9@-128.27,115.316 -128.27,116.586 -129.032,117.348 -132.842,117.348 -134.874,115.316 -134.874,111.76 -137.668,108.966 -143.51,108.966 -153.67,98.806 -153.67,97.282 -146.427,90.039 -146.427,73.041 -138.918,65.532 -138.918,43.16 -120.396,24.638 -103.124,24.638 -88.138,9.652 -84.542,9.652 v1(-82.52,11.674)
XTAL1: J6.51 J17.1 | length 34.4
  Top Layer w0.5: J6.51@-133.838,94.723 -133.838,98.272 v1(-132.588,99.522)
  Mid Layer 2 w0.5: v1(-132.588,99.522) -131.78,100.33 -124.206,100.33 -115.57,108.966 -115.57,114.046 -116.84,115.316 J17.1@-118.11,115.316
XTAL2: J6.53 J17.2 | length 28.2
  Top Layer w0.5: J6.53@-135.108,94.723 v1@-135.108,97.262
  Mid Layer 2 w0.5: v1(-135.118,97.272) -135.118,99.07 -130.556,103.632 -125.222,103.632 -118.11,110.744 J17.2@-118.11,112.776
pads on no net: J5. J5.05 J5.07 J5.09 J5.10 J5.11 J5.12 J5.13 J5.14 J5.15 J5.16 J5.17 J5.18 J5.19 J5.20 J5.21 J5.22 J5.23 J5.24 J5.25 J5.26 J5.27 J5.28 J5.29 J5.30 J5.31 J5.32 J5.33 J5.34 J5.35 J5.36 J5.37 J5.38 J5.39 J5.40 J5.41 J5.42 J5.43 J5.44 J5.45 J5.46 J5.47 J5.48 J5.49 J5.51 J5.53 J5.55 J5.57 J5.58 J5.59 J5.60 J5.61 J5.62 J5.63 J5.64 J5.65 J5.66 J5.67 J5.68 J5.69 J5.70 J5.71 J5.73 J5.74 J5.75 J5.76 J5.77 J5.78 J6. J6.21 J6.54 J7. J8. J8.10 J8.12 J8.14 J8.16 J8.41 J8.43 J8.45 J8.46 J8.47 J8.48 J8.49 J8.51 J8.53 J8.55 J8.57 J8.59 J8.61 J8.63 J8.65

## Polygon pours and split planes (outlines as drawn)
GND on Mid Layer 2 "GND_L03_P001" (solid, remove dead copper, pour order 1): -162.566,-53.433 -158.652,-57.13 -1.25,-57.13 2.522,-53.358 2.522,123.208 -1.27,127 -158.652,127 -162.566,123.208
+3V3 on Mid Layer 2 "+3V3_L03_P000" (solid, pour order 0): -147.32,116.84 -136.906,116.84 -136.906,111.252 -147.32,111.252
GND on Top Layer "GND_L01_P004" (solid, remove dead copper, pour order 4): -158.652,-57.15 -162.462,-53.34 -162.566,-53.34 -162.566,123.208 -158.774,127 -1.27,127 2.522,123.208 2.54,123.208 2.54,-53.34 -1.25,-57.13
GND on Bottom Layer "GND_L04_P005" (solid, remove dead copper, pour order 5): -158.652,-57.132 -162.566,-53.433 -162.566,123.208 -158.774,127 -1.27,127 2.522,123.208 2.522,-53.34 -1.27,-57.132
GND on Mid Layer 1 (split plane): 0.294,129.482 0.586,129.453 0.876,129.406 1.163,129.339 1.444,129.253 1.719,129.15 1.987,129.029 2.246,128.89 2.496,128.735 2.734,128.564 2.962,128.377 3.176,128.176 3.377,127.962 3.564,127.734 3.735,127.496 3.89,127.246 4.029,126.987 4.15,126.719 4.253,126.444 4.339,126.163 4.406,125.876 4.453,125.586 4.482,125.294 4.491,125.018 4.49,125 4.49,-55 4.491,-55.018 4.482,-55.294 4.453,-55.586 4.406,-55.876 4.339,-56.163 4.253,-56.444 4.15,-56.719 4.029,-56.987 3.89,-57.246 3.735,-57.496 3.564,-57.734 3.377,-57.962 3.176,-58.176 2.962,-58.377 2.734,-58.564 2.496,-58.735 2.246,-58.89 1.987,-59.029 1.719,-59.15 1.444,-59.253 1.163,-59.339 0.876,-59.406 0.586,-59.453 0.294,-59.482 0.018,-59.491 0,-59.49 -160,-59.49 -160.018,-59.491 -160.294,-59.482 -160.586,-59.453 -160.876,-59.406 -161.163,-59.339 -161.444,-59.253 -161.719,-59.15 -161.987,-59.029 -162.246,-58.89 -162.496,-58.735 -162.734,-58.564 -162.962,-58.377 -163.176,-58.176 -163.377,-57.962 -163.564,-57.734 -163.735,-57.496 -163.89,-57.246 -164.029,-56.987 -164.15,-56.719 -164.253,-56.444 -164.339,-56.163 -164.406,-55.876 -164.453,-55.586 -164.482,-55.294 -164.491,-55.018 -164.49,-55 -164.49,125 -164.491,125.018 -164.482,125.294 -164.453,125.586 -164.406,125.876 -164.339,126.163 -164.253,126.444 -164.15,126.719 -164.029,126.987 -163.89,127.246 -163.735,127.496 -163.564,127.734 -163.377,127.962 -163.176,128.176 -162.962,128.377 -162.734,128.564 -162.496,128.735 -162.246,128.89 -161.987,129.029 -161.719,129.15 -161.444,129.253 -161.163,129.339 -160.876,129.406 -160.586,129.453 -160.294,129.482 -160.018,129.491 -160,129.49 0,129.49 0.018,129.491

## Silkscreen, mask and mechanical layers (free items; w line width, h text height)
Top Overlay:
  drawing of 81 lines, arcs and shapes, not listed
  text "+3V3" at -139.446,125.222 h1.52 r270
  text "VDDSB" at -131.826,125.222 h1.52 r270
  text "VFLEX" at -129.286,125.222 h1.52 r270
  text "VCCIN" at -126.746,125.222 h1.52 r270
  text "/ESR0" at -124.206,125.222 h1.52 r270
  text "VAREF1" at -121.666,125.222 h1.52 r270
  text "XTAL1" at -119.126,125.222 h1.52 r270
  text "GND" at -149.606,123.952 h1.52 r270
  text "AN43" at -73.326,123.637 h1.52 r270
  text "AN42" at -70.786,123.637 h1.52 r270
  text "AN41" at -68.246,123.637 h1.52 r270
  text "AN40" at -65.706,123.637 h1.52 r270
  text "AN29" at -58.086,123.637 h1.52 r270
  text "AN28" at -55.546,123.637 h1.52 r270
  text "AN27" at -53.006,123.637 h1.52 r270
  text "AN26" at -50.466,123.637 h1.52 r270
  text "AN25" at -47.926,123.637 h1.52 r270
  text "AN24" at -45.386,123.637 h1.52 r270
  text "AN23" at -42.846,123.637 h1.52 r270
  text "AN22" at -40.306,123.637 h1.52 r270
  text "AN21" at -37.766,123.637 h1.52 r270
  text "AN20" at -35.226,123.637 h1.52 r270
  text "AN9" at -27.606,123.637 h1.52 r270
  text "AN8" at -25.066,123.637 h1.52 r270
  text "AN7" at -22.526,123.637 h1.52 r270
  text "AN6" at -19.986,123.637 h1.52 r270
  text "AN5" at -17.446,123.637 h1.52 r270
  text "AN4" at -14.906,123.637 h1.52 r270
  text "AN3" at -12.366,123.637 h1.52 r270
  text "AN2" at -9.826,123.637 h1.52 r270
  text "AN1" at -7.286,123.637 h1.52 r270
  text "AN0" at -4.746,123.637 h1.52 r270
  text "/PORST" at -131.826,109.982 h1.52 r270
  text "VDDM" at -129.286,109.982 h1.52 r270
  text "VEXT" at -126.746,109.982 h1.52 r270
  text "/ESR1" at -124.206,109.982 h1.52 r270
  text "VAREF2" at -121.666,109.982 h1.52 r270
  text "XTAL2" at -119.126,109.982 h1.52 r270
  text "AN47" at -73.326,109.667 h1.52 r270
  text "AN46" at -70.786,109.667 h1.52 r270
  text "AN45" at -68.246,109.667 h1.52 r270
  text "AN44" at -65.706,109.667 h1.52 r270
  text "AN39" at -58.086,109.667 h1.52 r270
  text "AN38" at -55.546,109.667 h1.52 r270
  text "AN37" at -53.006,109.667 h1.52 r270
  text "AN36" at -50.466,109.667 h1.52 r270
  text "AN35" at -47.926,109.667 h1.52 r270
  text "AN34" at -45.386,109.667 h1.52 r270
  text "AN33" at -42.846,109.667 h1.52 r270
  text "AN32" at -40.306,109.667 h1.52 r270
  text "AN31" at -37.766,109.667 h1.52 r270
  text "AN30" at -35.226,109.667 h1.52 r270
  text "AN19" at -27.606,109.667 h1.52 r270
  text "AN18" at -25.066,109.667 h1.52 r270
  text "AN17" at -22.526,109.667 h1.52 r270
  text "AN16" at -19.986,109.667 h1.52 r270
  text "AN15" at -17.446,109.667 h1.52 r270
  text "AN14" at -14.906,109.667 h1.52 r270
  text "AN13" at -12.366,109.667 h1.52 r270
  text "AN12" at -9.826,109.667 h1.52 r270
  text "AN11" at -7.286,109.667 h1.52 r270
  text "AN10" at -4.746,109.667 h1.52 r270
  text "X602" at -99.227,96.313 h3 r270
  text "X603" at -34.203,96.322 h3 r270
  text "X601" at -99.227,10.791 h3 r270
  text "X604" at -32.679,10.807 h3 r270
  text "Infineon TriBoard TC3X7 V2.0 /  / TC397/TC387/TC377/TC3E7" at -160,0 h3.5
  text "P20.8" at -154.606,-4.633 h1.52 r270
  text "P20.7" at -152.066,-4.633 h1.52 r270
  text "P20.6" at -149.526,-4.633 h1.52 r270
  text "P20.3" at -146.986,-4.633 h1.52 r270
  text "P20.2" at -144.446,-4.633 h1.52 r270
  text "P20.1" at -141.906,-4.633 h1.52 r270
  text "P20.0" at -139.366,-4.633 h1.52 r270
  text "P15.4" at -131.746,-4.633 h1.52 r270
  text "P15.3" at -129.206,-4.633 h1.52 r270
  text "P15.2" at -126.666,-4.633 h1.52 r270
  text "P15.1" at -124.126,-4.633 h1.52 r270
  text "P15.0" at -121.586,-4.633 h1.52 r270
  text "P14.7" at -113.966,-4.633 h1.52 r270
  text "P14.3" at -111.426,-4.633 h1.52 r270
  text "P14.1" at -108.886,-4.633 h1.52 r270
  text "P14.0" at -106.346,-4.633 h1.52 r270
  text "P13.1" at -98.726,-4.633 h1.52 r270
  text "P13.0" at -96.186,-4.633 h1.52 r270
  text "P12.0" at -88.566,-4.633 h1.52 r270
  text "P11.14" at -80.946,-4.633 h1.52 r270
  text "P11.13" at -78.406,-4.633 h1.52 r270
  text "P10.4" at -70.786,-4.633 h1.52 r270
  text "P10.3" at -68.246,-4.633 h1.52 r270
  text "P10.2" at -65.706,-4.633 h1.52 r270
  text "P10.1" at -63.166,-4.633 h1.52 r270
  text "P10.0" at -60.626,-4.633 h1.52 r270
  text "P02.5" at -53.006,-4.633 h1.52 r270
  text "P02.4" at -50.466,-4.633 h1.52 r270
  text "P02.3" at -47.926,-4.633 h1.52 r270
  text "P02.2" at -45.386,-4.633 h1.52 r270
  text "P02.1" at -42.846,-4.633 h1.52 r270
  text "P02.0" at -40.306,-4.633 h1.52 r270
  text "P01.5" at -32.686,-4.633 h1.52 r270
  text "P01.4" at -30.146,-4.633 h1.52 r270
  text "P01.3" at -27.606,-4.633 h1.52 r270
  text "P00.6" at -19.986,-4.633 h1.52 r270
  text "P00.5" at -17.446,-4.633 h1.52 r270
  text "P00.4" at -14.906,-4.633 h1.52 r270
  text "P00.3" at -12.366,-4.633 h1.52 r270
  text "P00.2" at -9.826,-4.633 h1.52 r270
  text "P00.1" at -7.286,-4.633 h1.52 r270
  text "P00.0" at -4.746,-4.633 h1.52 r270
  text "GND" at -154.606,-19.873 h1.52 r270
  text "P20.14" at -152.066,-19.873 h1.52 r270
  text "P20.13" at -149.526,-19.873 h1.52 r270
  text "P20.12" at -146.986,-19.873 h1.52 r270
  text "P20.11" at -144.446,-19.873 h1.52 r270
  text "P20.10" at -141.906,-19.873 h1.52 r270
  text "P20.9" at -139.366,-19.873 h1.52 r270
  text "GND" at -131.746,-19.873 h1.52 r270
  text "P15.8" at -129.206,-19.873 h1.52 r270
  text "P15.7" at -126.666,-19.873 h1.52 r270
  text "P15.6" at -124.126,-19.873 h1.52 r270
  text "P15.5" at -121.586,-19.873 h1.52 r270
  text "GND" at -113.966,-19.873 h1.52 r270
  text "P14.10" at -111.426,-19.873 h1.52 r270
  text "P14.9" at -108.886,-19.873 h1.52 r270
  text "P14.8" at -106.346,-19.873 h1.52 r270
  text "P13.3" at -98.726,-19.873 h1.52 r270
  text "P13.2" at -96.186,-19.873 h1.52 r270
  text "P12.1" at -88.566,-19.873 h1.52 r270
  text "GND" at -80.946,-19.873 h1.52 r270
  text "P11.15" at -78.406,-19.873 h1.52 r270
  text "GND" at -70.786,-19.873 h1.52 r270
  text "P10.8" at -68.246,-19.873 h1.52 r270
  text "P10.7" at -65.706,-19.873 h1.52 r270
  text "P10.6" at -63.166,-19.873 h1.52 r270
  text "P10.5" at -60.626,-19.873 h1.52 r270
  text "P02.11" at -53.006,-19.873 h1.52 r270
  text "P02.10" at -50.466,-19.873 h1.52 r270
  text "P02.9" at -47.926,-19.873 h1.52 r270
  text "P02.8" at -45.386,-19.873 h1.52 r270
  text "P02.7" at -42.846,-19.873 h1.52 r270
  text "P02.6" at -40.306,-19.873 h1.52 r270
  text "GND" at -32.686,-19.873 h1.52 r270
  text "P01.7" at -30.146,-19.873 h1.52 r270
  text "P01.6" at -27.606,-19.873 h1.52 r270
  text "GND" at -19.986,-19.873 h1.52 r270
  text "P00.12" at -17.446,-19.873 h1.52 r270
  text "P00.11" at -14.906,-19.873 h1.52 r270
  text "P00.10" at -12.366,-19.873 h1.52 r270
  text "P00.9" at -9.826,-19.873 h1.52 r270
  text "P00.8" at -7.286,-19.873 h1.52 r270
  text "P00.7" at -4.746,-19.873 h1.52 r270
  text "P34.3" at -98.726,-32.573 h1.52 r270
  text "P34.2" at -96.186,-32.573 h1.52 r270
  text "P34.1" at -93.646,-32.573 h1.52 r270
  text "P33.7" at -86.026,-32.573 h1.52 r270
  text "P33.6" at -83.486,-32.573 h1.52 r270
  text "P33.5" at -80.946,-32.573 h1.52 r270
  text "P33.4" at -78.406,-32.573 h1.52 r270
  text "P33.3" at -75.866,-32.573 h1.52 r270
  text "P33.2" at -73.326,-32.573 h1.52 r270
  text "P33.1" at -70.786,-32.573 h1.52 r270
  text "P33.0" at -68.246,-32.573 h1.52 r270
  text "P32.4" at -60.626,-32.573 h1.52 r270
  text "P32.3" at -58.086,-32.573 h1.52 r270
  text "P32.2" at -55.546,-32.573 h1.52 r270
  text "P23.3" at -47.926,-32.573 h1.52 r270
  text "P23.2" at -45.386,-32.573 h1.52 r270
  text "P23.1" at -42.846,-32.573 h1.52 r270
  text "P23.0" at -40.306,-32.573 h1.52 r270
  text "P22.5" at -32.686,-32.573 h1.52 r270
  text "P22.4" at -30.146,-32.573 h1.52 r270
  text "P22.3" at -27.606,-32.573 h1.52 r270
  text "P22.2" at -25.066,-32.573 h1.52 r270
  text "P22.1" at -22.526,-32.573 h1.52 r270
  text "P22.0" at -19.986,-32.573 h1.52 r270
  text "P21.3" at -12.366,-32.573 h1.52 r270
  text "P21.2" at -9.826,-32.573 h1.52 r270
  text "P21.1" at -7.286,-32.573 h1.52 r270
  text "P21.0" at -4.746,-32.573 h1.52 r270
  text "Extension Board for TriBoard TC3X7 V2.0" at -158.25,-35.565 h3.5
  text "Designed by Dwayne Herzberg / V0.1 – April 2025" at -142.25,-42.946 h3
  text "GND" at -98.726,-47.813 h1.52 r270
  text "P34.5" at -96.186,-47.813 h1.52 r270
  text "P34.4" at -93.646,-47.813 h1.52 r270
  text "P33.15" at -86.026,-47.813 h1.52 r270
  text "P33.14" at -83.486,-47.813 h1.52 r270
  text "P33.13" at -80.946,-47.813 h1.52 r270
  text "P33.12" at -78.406,-47.813 h1.52 r270
  text "P33.11" at -75.866,-47.813 h1.52 r270
  text "P33.10" at -73.326,-47.813 h1.52 r270
  text "P33.9" at -70.786,-47.813 h1.52 r270
  text "P33.8" at -68.246,-47.813 h1.52 r270
  text "P32.7" at -60.626,-47.813 h1.52 r270
  text "P32.6" at -58.086,-47.813 h1.52 r270
  text "P32.5" at -55.546,-47.813 h1.52 r270
  text "P23.7" at -47.926,-47.813 h1.52 r270
  text "P23.6" at -45.386,-47.813 h1.52 r270
  text "P23.5" at -42.846,-47.813 h1.52 r270
  text "P23.4" at -40.306,-47.813 h1.52 r270
  text "P22.11" at -32.686,-47.813 h1.52 r270
  text "P22.10" at -30.146,-47.813 h1.52 r270
  text "P22.9" at -27.606,-47.813 h1.52 r270
  text "P22.8" at -25.066,-47.813 h1.52 r270
  text "P22.7" at -22.526,-47.813 h1.52 r270
  text "P22.6" at -19.986,-47.813 h1.52 r270
  text "P21.7" at -12.366,-47.813 h1.52 r270
  text "P21.6" at -9.826,-47.813 h1.52 r270
  text "P21.5" at -7.286,-47.813 h1.52 r270
  text "P21.4" at -4.746,-47.813 h1.52 r270
  text "Licensed under CERN-OHL-P v2" at -142.5,-51.5 h3
Mechanical 52:
  circle w0.013: c-32.533,92.202 r2
  circle w0.013: c-30.739,7.166 r2
  circle w0.013: c-156.419,7.166 r2
  circle w0.013: c-156.419,92.688 r2
  lines w0.013: -160,7.166 0,7.166 ; -160,92.688 0,92.688 ; -102.088,0 -102.088,92.688 -102.088,100 ; -37.064,81.076 -37.064,100 ; -35.54,0 -35.54,25.045 ; -165,-55 ccw(c-160,-55) -160,-60 0,-60 ccw(c0,-55) 5,-55 5,125 ccw(c0,125) 0,130 -160,130 ccw(c-160,125) -165,125 -165,-55 ; -160,0 -160,100 0,100 0,0 -160,0